# Altium PCB Sensor Node - Adafruit ItsyBitsy nRF52840 Shield.PcbDoc
Units mm, origin at the board's own origin, x right, y up, seen from the top; angles counter-clockwise.
Board outline 46 x 75.5 mm, 2 copper layers (Top Layer, Bottom Layer), stack 1.569 mm thick; 20 components, 23 nets, 121 pads, 12 vias.
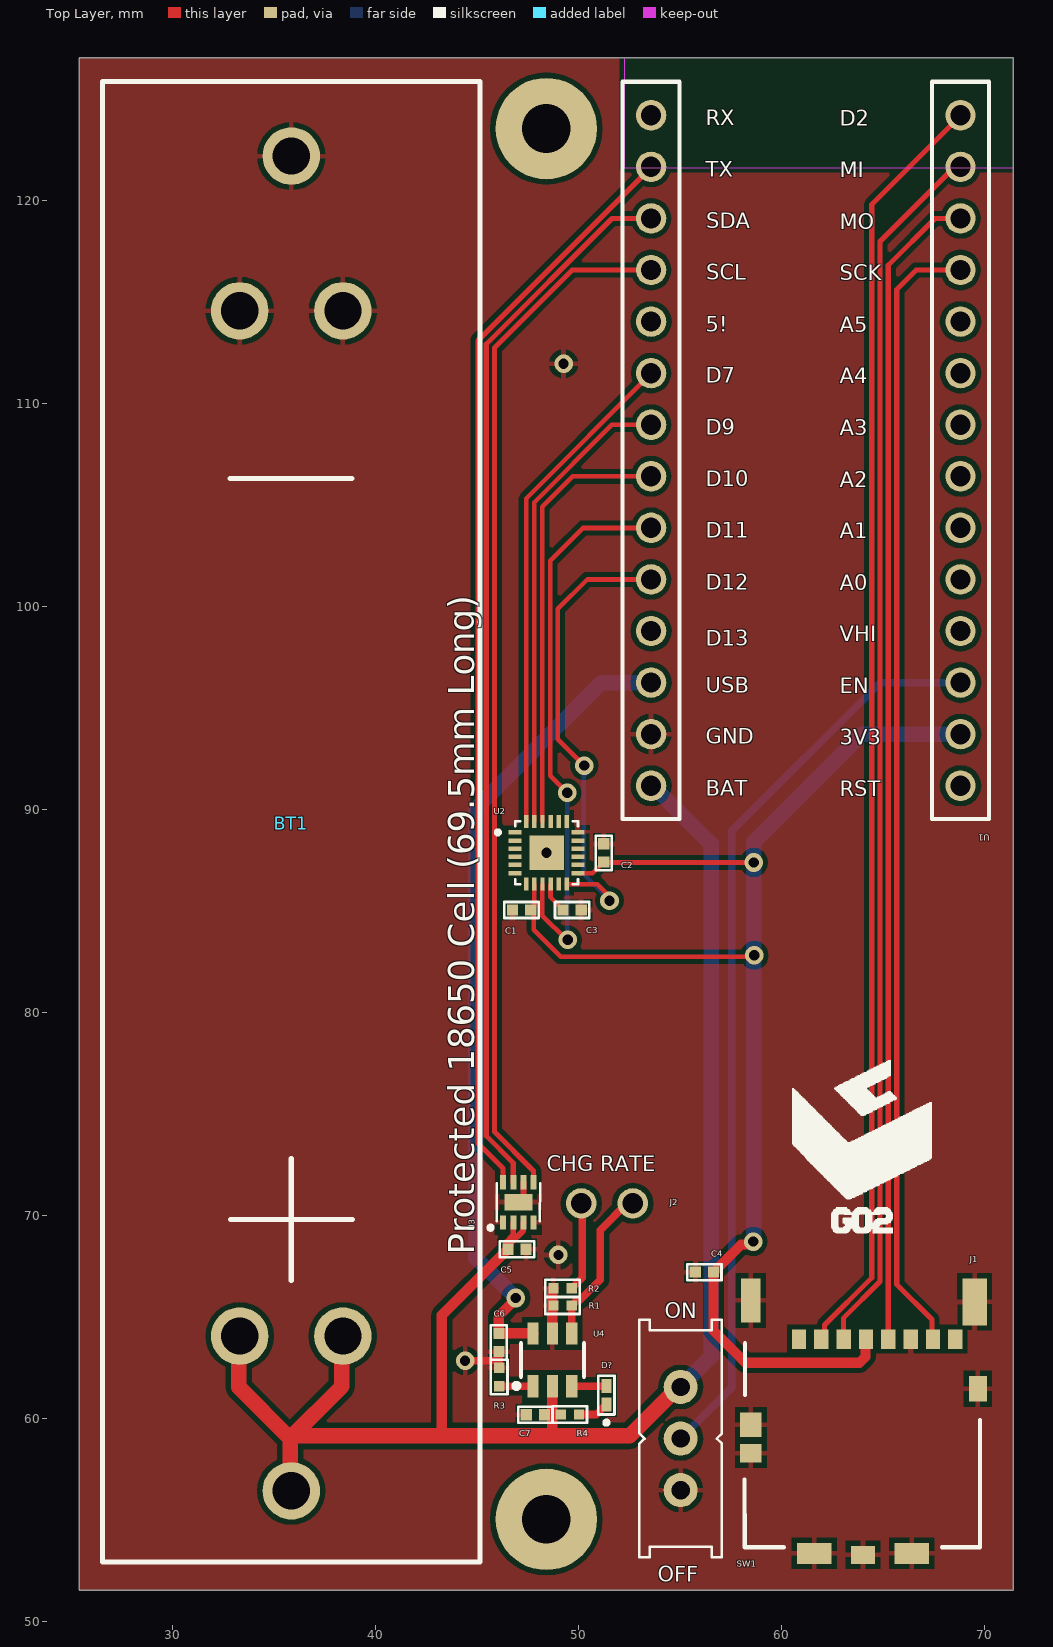
[diagram p0: Top Layer view]
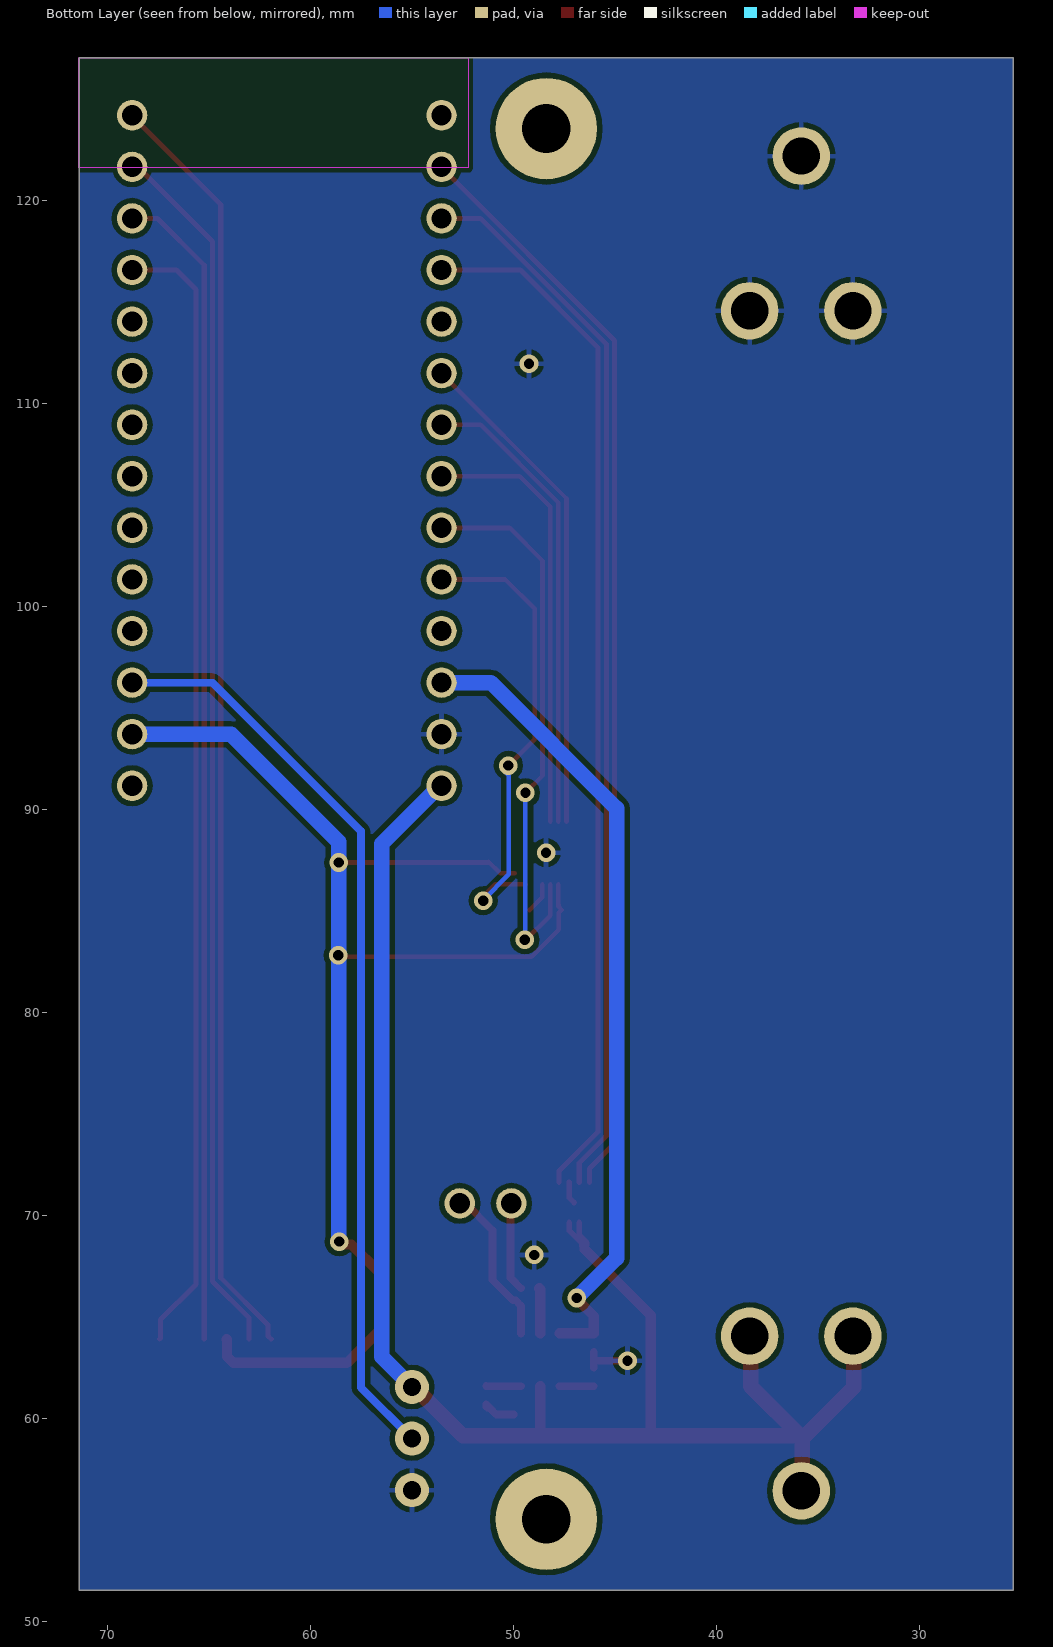
[diagram p1: Bottom Layer view, seen from below]

## Layer stack, top to bottom
Top Solder: solder mask 0.0254, SM-001, Dk 4
Top Layer: signal copper 0.035
Dielectric 1: core 1.4986, Core-043, Dk 4.3
Bottom Layer: signal copper 0.035
Bottom Solder: solder mask 0.0254, SM-001, Dk 4

## Board outline
25.4,127.05 25.4,51.55 71.4,51.55 71.4,127.05

## Design rules (kind name [scope] priority, off if disabled: settings)
Clearance [All] p1: gap=0.254 ignorepadtopadclearanceinfootprint=TRUE except(0: Arc-Hole Track-Hole SMDPad-Hole THPad-Hole Via-Hole Fill-Hole Poly-Hole Region-Hole Text-Hole; 0.152: Arc-Arc Arc-Track Arc-SMDPad Track-Track Track-SMDPad)
PolygonConnect [All] p1: connectstyle=Relief reliefconductorwidth=0.254 reliefentries=4 polygonreliefangle="90 Angle" airgapwidth=0.254
RoomDefinition "Sensor Node - Adafruit ItsyBitsy nRF52840 Shield" [InComponentClass('Sensor Node - Adafruit ItsyBitsy nRF52840 Shield')] p1: confinementstyle=ConfineIn formatcopy=TRUE lockcomponents=FALSE outline 77.8,52.325 129.275,52.325 129.275,130.25 77.8,130.25
RoutingVias [All] p1: holewidth=0.711 width=1.27 viastyle="Through Hole" minholewidth=0.711 minwidth=1.27 maxholewidth=0.711 maxwidth=1.27
SolderMaskExpansion [All] p1: expansion=0.102 istentingtop=FALSE
Width [All] p1: maxlimit=0.762 minlimit=0.229 preferedwidth=0.381
30 further rules are at their usual default settings.

## Components (designator, comment, footprint, x,y, rotation, side; value= is the part's Value field where it differs from the comment)
BT1 "3.7V Li-Ion 18650 Cell" "18650 Battery Clip" 35.84,88.075 r90 top
C1 "10nF 16V 0402" "0402 CAP" 47.193,85.065 r0 top value=10nF
C2 "0.1uF 16V 0402" "0402 CAP" 51.232,87.884 r90 top value=0.1uF
C3 "0.1uF 16V 0402" "0402 CAP" 49.682,85.065 r0 top value=0.1uF
C4 "0.1uF 16V 0402" "0402 CAP" 56.175,67.225 r180 top value=0.1uF
C5 "0.1uF 16V 0402" "0402 CAP" 46.965,68.351 r0 top value=0.1uF
C6 "1uF 16V 0402" "0402 CAP" 46.065,63.752 r270 top value=1uF
C7 "1uF 16V 0402" "0402 CAP" 47.854,60.198 r180 top value=1uF
D? "0402 Red LED" "0402 LED" 51.384,61.163 r90 top
J1 "MOLEX 5040771891" "MOLEX 5040771891" 64.04,59.825 r0 top
J2 "2 POS JUMPER" SNT-100-BK-G 51.41,70.612 r180 top
R1 "1.1k 1% 0402" "0402 RES" 49.204,65.566 r0 top
R2 "1.74k 1% 0402" "0402 RES" 49.2,66.421 r0 top
R3 "10k 1% 0402" "0402 RES" 46.063,62.06 r270 top
R4 "1.5k 1% 0402" "0402 RES" 49.555,60.198 r0 top
SW1 "EG1903" EG1218 55.016,59.03 r270 top
U1 "Adafruit ItsyBitsy nRF52840 Express" "Adafruit ItsyBitsy nRF52840 Express" 61.18,107.695 r180 top
U2 "MPU-6500" MPU-6500 48.412,87.884 r0 top
U3 "MAX17048G+T10" MAX17048G+T10 47.025,70.665 r90 top
U4 "BQ21040DBVR" BQ21040DBVR 48.7,62.9 r0 top

## Footprints (in the part's own frame and the unit in brackets; to place one, negate y for a bottom-side part, rotate by r counter-clockwise, add the part's x,y. Pads: shape width x height; smd on the part's side, far side on the other; paste and mask are expansions set on the pad)
"0402 CAP" [mm]
  rect 0.55x0.55 smd mask+0.05: 1(-0.458,0) 2(0.442,0)
  silkscreen extent -0.85,-0.39 0.84,0.39, body extent -0.51,-0.24 0.51,0.26, height 0.52
"0402 LED" [mm]
  rect 0.7x0.5 smd: 1(-0.45,0.025) 2(0.45,0.025)
  silkscreen extent -1.45,-0.37 0.95,0.43, body extent -0.5,-0.22 0.51,0.28, height 0.45
"0402 RES" [mil]
  rect 20x20 smd: 1(17.74,0.51) 2(-17.7,0.51)
  silkscreen extent -33,-16 33,17, body extent -20,-9 20,11, height 14
"18650 Battery Clip" [mm]
  round 2.83 hole 1.83: 1(-31.62,0) 1(-24,-2.54) 1(-24,2.54) 2(26.5,-2.54) 2(26.5,2.54) 2(34.12,0)
  silkscreen extent -35.12,-9.3 37.8,9.3, body extent -35.28,-9.44 37.92,9.44, height 19.7
"Adafruit ItsyBitsy nRF52840 Express" [mm] "Adafruit ItsyBitsy nRF52840 Express"
  round 1.5 hole 1: 1(-7.62,16.51) 2(-7.62,13.97) 3(-7.62,11.43) 4(-7.62,8.89) 5(-7.62,6.35) 6(-7.62,3.81) 7(-7.62,1.27) 8(-7.62,-1.27) 9(-7.62,-3.81) 10(-7.62,-6.35) 11(-7.62,-8.89) 12(-7.62,-11.43) 13(-7.62,-13.97) 14(-7.62,-16.51) 15(7.62,-16.51) 16(7.62,-13.97) 17(7.62,-11.43) 18(7.62,-8.89) 19(7.62,-6.35) 20(7.62,-3.81) 21(7.62,-1.27) 22(7.62,1.27) 23(7.62,3.81) 24(7.62,6.35) 25(7.62,8.89) 26(7.62,11.43) 27(7.62,13.97) 28(7.62,16.51)
  silkscreen extent -9.02,-18.16 9.02,18.16, body extent -8.93,-18.03 8.89,18.38, height 12.89
BQ21040DBVR [mm]
  rect 0.55x1.1 smd: 1(-0.95,-1.3) 2(0,-1.3) 3(0.95,-1.3) 4(0.95,1.3) 5(0,1.3) 6(-0.95,1.3)
  silkscreen extent -1.9,-1.4 1.55,0.82, body extent -1.55,-1.5 1.55,1.5, height 1.4
EG1218 [mil]
  round 66 hole 35.43: 1(-100,0) 2(0,0) 3(100,0)
  silkscreen extent -230,-80 230,80, body extent -228,-80 228,78, height 276
MAX17048G+T10 [mm]
  rect 0.7x0.3 smd: 1(-0.99,0.75) 2(-0.99,0.25) 3(-0.99,-0.25) 4(-0.99,-0.75) 5(0.99,-0.75) 6(0.99,-0.25) 7(0.99,0.25) 8(0.99,0.75)
  rect 0.8x1.38 smd: 9(0,0)
  silkscreen extent -1.35,-1.07 0.94,1.47, body extent -1,-1 1,1, height 0.75
"MOLEX 5040771891" [mm]
  rect 0.7x0.95 smd: 1(-3.195,4.1) 2(-2.095,4.1) 3(-0.995,4.1) 4(0.105,4.1) 5(1.205,4.1) 6(2.305,4.1) 7(3.405,4.1) 8(4.505,4.1)
  rect 0.95x2.17 smd: 9(-5.57,6.01)
  rect 1.05x0.9 smd: 9(-5.565,-1.525)
  rect 1.05x1.2 smd: 9(-5.565,-0.115)
  rect 1.7x1.03 smd: 9(-2.44,-6.45) 9(2.36,-6.45)
  rect 1.2x0.88 smd: 9(-0.04,-6.525)
  rect 1.19x2.3 smd: 9(5.46,5.935)
  rect 0.88x1.25 smd: 9(5.615,1.66)
  silkscreen extent -5.87,-6.15 5.72,3.9, body extent -5.76,-6.65 5.62,6.85, height 1.26
MPU-6500 [mm]
  rect 0.64x0.22 smd: 1(-1.545,1) 2(-1.545,0.6) 3(-1.545,0.2) 4(-1.545,-0.2) 5(-1.545,-0.6) 6(-1.545,-1) 13(1.545,-1) 14(1.545,-0.6) 15(1.545,-0.2) 16(1.545,0.2) 17(1.545,0.6) 18(1.545,1)
  rect 0.22x0.64 smd: 7(-1,-1.545) 8(-0.6,-1.545) 9(-0.2,-1.545) 10(0.2,-1.545) 11(0.6,-1.545) 12(1,-1.545) 19(1,1.545) 20(0.6,1.545) 21(0.2,1.545) 22(-0.2,1.545) 23(-0.6,1.545) 24(-1,1.545)
  rect 1.7x1.7 smd: 25(0,0)
  silkscreen extent -2.5,-1.55 1.55,1.55, body extent -1.5,-1.5 1.5,1.5, height 0.9
SNT-100-BK-G [mm]
  round 1.5 hole 1: 1(-1.25,0) 2(1.29,0)
  body extent -2.54,-1.29 2.54,1.25, height 8.6

## Part data
BT1: library part Battery, "Multicell Battery", Digikey PN=36-54-ND
C1: library part Cap, "Capacitor", Supplier Part Number=490-6309-2-ND
C2 C3 C4 C5: library part Cap, "Capacitor", Supplier Part Number=490-5415-2-ND
C6 C7: library part Cap, "Capacitor", Supplier Part Number=490-10017-1-ND
D?: library part LED0, Digikey PN=754-1104-1-ND
J2: library part "Header 2H", Digikey PN=SAM8858-ND
R1 R2 R3 R4: library part Res1, "Resistor"
  R1: Digikey PN=311-1.10KLRCT-ND
  R2: Digikey PN=YAG3046CT-ND
  R3: Digikey PN=311-10.0KLRCT-ND
  R4: Digikey PN=311-1.50KLRCT-ND
SW1: library part SW-SPDT, "SPDT Subminiature Toggle Switch, Right Angle Mounting, Vertical Actuation", Digikey PN=EG1903-ND
U1: Digikey PN=S7012-ND
U3: Digikey PN=MAX17048G+T10CT-ND
U4: Digikey PN=296-47315-1-ND

## Free pads (board coordinates)
  round 5 hole 2.4: 1(48.4,55.05) 1(48.4,123.55)

## Via types
v1: diameter 0.914, hole 0.508, Top Layer to Bottom Layer, 12 vias

## Nets (pads, with @x,y where several pads share a name; then routed paths per layer and width w, separated by ;. In a path a pad name is that pad's centre, name@x,y a point inside that pad or via, vN(x,y) a via of type N, cw(c..) or ccw(c..) an arc to the next point about the centre after c; other vN are vias at no path point)
3V3: C1.2 C2.1 C4.1 J1.4 U1.2 U2.8 U2.13 | length 69.4
  Top Layer w0.229: U2.8 47.808,86.335 47.808,86.06 47.803,86.055 47.803,85.359 47.796,85.351 47.796,85.225 C1.2 47.777,84.922 47.777,84.099 49.111,82.765 58.585,82.765 v1(58.649,82.829) ; U2.13@49.951,86.869 50.676,86.869 C2.1 51.256,87.401 v1(58.623,87.401)
  Top Layer w0.508: v1(58.598,68.732) 58.452,68.587 57.996,68.587 C4.1 56.634,64.341 58.212,62.763 63.825,62.763 64.122,63.061 64.122,63.902 J1.4
  Bottom Layer w0.762: v1(58.598,68.732) 58.623,68.758 58.623,82.829 v1(58.623,87.401) 58.623,88.417 63.926,93.72 U1.2@68.815,93.72
BATT_INT: U1.18 U3.5 | length 51.2
  Top Layer w0.254: U3.5 47.775,72.215 45.847,74.143 45.847,112.751 49.676,116.58 U1.18@53.575,116.58
BATT_SCL: U1.17 U3.7 | length 52.5
  Top Layer w0.254: U3.7 46.775,72.605 45.441,73.939 45.441,112.928 51.632,119.12 U1.17@53.575,119.12
BATT_SDA: U1.16 U3.8 | length 54.1
  Top Layer w0.254: U3.8 46.275,72.336 45.034,73.577 45.034,113.119 U1.16@53.575,121.66
GND: BT1.2 C1.1 C2.2 C3.2 C4.2 C5.2 C6.2 C7.2 J1.6 J1.9 R1.2 R2.2 R3.2 SW1.3 U1.27 U2.18 U2.25 U3.1 U3.4 U3.6 U3.9 U4.5 | length 6
  Top Layer w0.254: v1@44.247,62.865 v1(44.399,62.865) ; R3.2@46.065,62.52 R3.2
  Top Layer w0.279: U3.9@47.037,70.658 47.275,70.897 U3.6
  Top Layer w0.381: v1(44.399,62.865) 46.065,62.865 ; R3.2@46.065,62.52 46.065,62.865 ; C6.2 46.065,62.865
  Top Layer w0.508: U4.5 48.7,66.384 R2.2
  other v1: 48.997,68.072 48.412,87.884 49.251,111.963
IMU_CS: U1.22 U2.22 | length 21.5
  Top Layer w0.229: U2.22@48.206,89.414 48.206,104.924 49.702,106.42 U1.22@53.575,106.42
IMU_INT: U1.24 U2.12 | length 23.8
  Top Layer w0.229: U2.12@49.406,86.324 50.912,86.324 51.689,85.547 51.664,85.522 v1(51.511,85.522) ; v1(50.267,92.177) 48.968,93.475 48.968,99.895 50.413,101.34 U1.24@53.575,101.34
  Bottom Layer w0.229: v1(50.267,92.177) 50.429,92.177 50.571,92.034 50.241,91.704 50.241,86.817 51.511,85.547 v1(51.511,85.522)
IMU_SCK: U1.21 U2.23 | length 23.1
  Top Layer w0.229: U2.23@47.806,89.414 47.806,105.134 51.632,108.96 U1.21@53.575,108.96
IMU_SDI: U1.20 U2.24 | length 24.6
  Top Layer w0.229: U2.24@47.406,89.414 47.406,105.331 U1.20@53.575,111.5
IMU_SDO: U1.23 U2.9 | length 28
  Top Layer w0.229: U2.9@48.206,86.324 48.206,84.789 49.403,83.591 v1(49.453,83.591) ; v1(49.428,90.83) 48.587,91.672 48.587,102.257 50.21,103.88 U1.23@53.575,103.88
  Bottom Layer w0.229: v1(49.428,90.83) 49.428,83.616 v1(49.453,83.591)
ISET: J2.1 R1.1 U4.4 | length 7.9
  Top Layer w0.381: U4.4 49.65,65.574 R1.1 49.913,65.837 50.046,65.837 51.054,66.845 51.054,69.291 52.375,70.612 J2.1
LDO_EN: SW1.2 U1.3 | length 45.3
  Bottom Layer w0.381: SW1.2 57.531,61.544 57.531,88.951 64.84,96.26 U1.3@68.815,96.26
nCHG: D?.2 U4.3 | length 1.7
  Top Layer w0.381: U4.3 51.346,61.6 D?.2
NetC3_1: C3.1 U2.10 | length 1.5
  Top Layer w0.229: U2.10@48.606,86.324 48.606,85.682 C3.1
NetD?_1: D?.1 R4.1 | length 1.6
  Top Layer w0.381: R4.1 50.857,60.211 51.2,60.554 51.3,60.554 51.359,60.613 D?.1
NetJ2_2: J2.2 R2.1 | length 4.4
  Top Layer w0.381: R2.1 50.165,66.949 50.165,70.567 J2.2
NetR3_1: R3.1 U4.1 | length 1.7
  Top Layer w0.381: R3.1 47.741,61.609 U4.1
SD_CS: J1.2 U1.14 | length 63.1
  Top Layer w0.254: J1.2 62.106,64.086 62.106,64.62 64.432,66.947 64.432,119.817 U1.14@68.815,124.2
SD_SCK: J1.5 U1.12 | length 57.4
  Top Layer w0.254: J1.5 65.245,116.82 67.545,119.12 U1.12@68.815,119.12
SD_SDI: J1.3 U1.13 | length 60.3
  Top Layer w0.254: J1.3 63.045,64.975 64.839,66.769 64.839,117.989 68.51,121.66 U1.13@68.815,121.66
SD_SDO: J1.7 U1.11 | length 56
  Top Layer w0.254: J1.7 67.397,63.973 67.397,64.886 65.659,66.624 65.659,115.621 66.618,116.58 U1.11@68.815,116.58
VBAT: BT1.1 C5.1 C7.1 R4.2 SW1.1 U1.28 U3.2 U3.3 U4.2 | length 82.2
  Top Layer w0.279: C5.1@46.406,68.566 46.406,68.682 46.775,69.051 U3.2 ; C5.1 46.641,68.486 46.641,68.638 47.265,69.261 47.265,69.665 U3.3
  Top Layer w0.508: 43.256,59.157 43.256,65.101 C5.1 ; 48.666,59.157 48.7,59.19 U4.2
  Top Layer w0.762: BT1.1@33.25,63.98 33.25,61.565 35.758,59.057 35.79,59.057 ; BT1.1@35.79,56.36 35.79,59.057 ; 35.85,59.157 43.256,59.157 48.666,59.157 52.502,59.157 54.915,61.57 SW1.1 ; BT1.1@38.33,63.98 38.33,61.597 35.79,59.057
  Bottom Layer w0.762: U1.28@53.575,91.18 53.651,91.18 56.515,88.316 56.515,63.068 SW1.1
VUSB: C6.1 U1.26 U4.6 | length 39.9
  Top Layer w0.508: v1(46.902,65.952) 46.902,65.902 46.065,65.065 C6.1 47.74,64.21 U4.6
  Bottom Layer w0.762: v1(46.902,65.952) 44.933,67.922 44.933,90.068 51.124,96.26 U1.26@53.575,96.26
pads on no net: J1.1 J1.8 U1.1 U1.4 U1.5 U1.6 U1.7 U1.8 U1.9 U1.10 U1.15 U1.19 U1.25 U2.1 U2.2 U2.3 U2.4 U2.5 U2.6 U2.7 U2.11 U2.14 U2.15 U2.16 U2.17 U2.19 U2.20 U2.21

## Polygon pours and split planes (outlines as drawn)
GND on Top Layer "TOP_POUR" (solid, remove dead copper, pour order 0): 25.4,127.051 25.4,51.537 71.399,51.537 71.399,127.051
GND on Bottom Layer "BOT_POUR" (solid, remove dead copper, pour order 1): 25.399,127.06 25.399,51.546 71.398,51.546 71.398,127.06

## Keep-outs
Keep-Out Layer:
  rectangle: 52.25,121.625 71.425,127.05

## Silkscreen, mask and mechanical layers (free items; w line width, h text height)
Top Overlay:
  drawing of 411 lines, arcs and shapes, not listed
  text "CHG RATE" at 48.425,72.2 h0.76
  text "ON" at 54.225,64.95 h0.76
  text "OFF" at 53.9,51.975 h0.76
Mechanical 1:
  lines w0.127: 25.4,51.55 71.4,51.55 71.35,51.6 71.35,127.05 25.4,127.05 25.4,51.55

## Text inside footprints (layer, text, board x,y; h text height)
BT1: Top Overlay "Protected 18650 Cell (69.5mm Long)" at 44.84,68.075 h1.27 r90
U1: Top Overlay "D11" at 56.255,103.395 h0.76; Top Overlay "3V3" at 62.855,93.195 h0.76; Top Overlay "A3" at 62.855,108.445 h0.76; Top Overlay "USB" at 56.255,95.77 h0.76; Top Overlay "RST" at 62.855,90.67 h0.76; Top Overlay "VHI" at 62.855,98.295 h0.76; Top Overlay "D9" at 56.255,108.47 h0.76; Top Overlay "A1" at 62.855,103.37 h0.76; Top Overlay "GND" at 56.255,93.245 h0.76; Top Overlay "A4" at 62.855,110.995 h0.76; Top Overlay "TX" at 56.255,121.17 h0.76; Top Overlay "MO" at 62.855,118.595 h0.76; Top Overlay "5!" at 56.255,113.545 h0.76; Top Overlay "MI" at 62.855,121.145 h0.76; Top Overlay "SCL" at 56.28,116.095 h0.76; Top Overlay "A5" at 62.855,113.52 h0.76; Top Overlay "D12" at 56.255,100.845 h0.76; Top Overlay "BAT" at 56.255,90.695 h0.76; Top Overlay "RX" at 56.255,123.72 h0.76; Top Overlay "D13" at 56.255,98.07 h0.76; Top Overlay "D10" at 56.255,105.945 h0.76; Top Overlay "D7" at 56.255,111.02 h0.76; Top Overlay "EN" at 62.855,95.745 h0.76; Top Overlay "SCK" at 62.855,116.07 h0.76; Top Overlay "A2" at 62.855,105.895 h0.76; Top Overlay "A0" at 62.855,100.82 h0.76; Top Overlay "D2" at 62.855,123.695 h0.76; Top Overlay "SDA" at 56.28,118.645 h0.76